# Altium PCB Pcb1.PcbDoc
Units mm, origin at the board's own origin, x right, y up, seen from the top; angles counter-clockwise.
Board outline 35 x 20 mm, 2 copper layers (Top Layer, Bottom Layer), stack 1.569 mm thick; 2 components, 3 nets, 4 pads, 0 vias.
Unrouted connection lines stored in the file: 1.
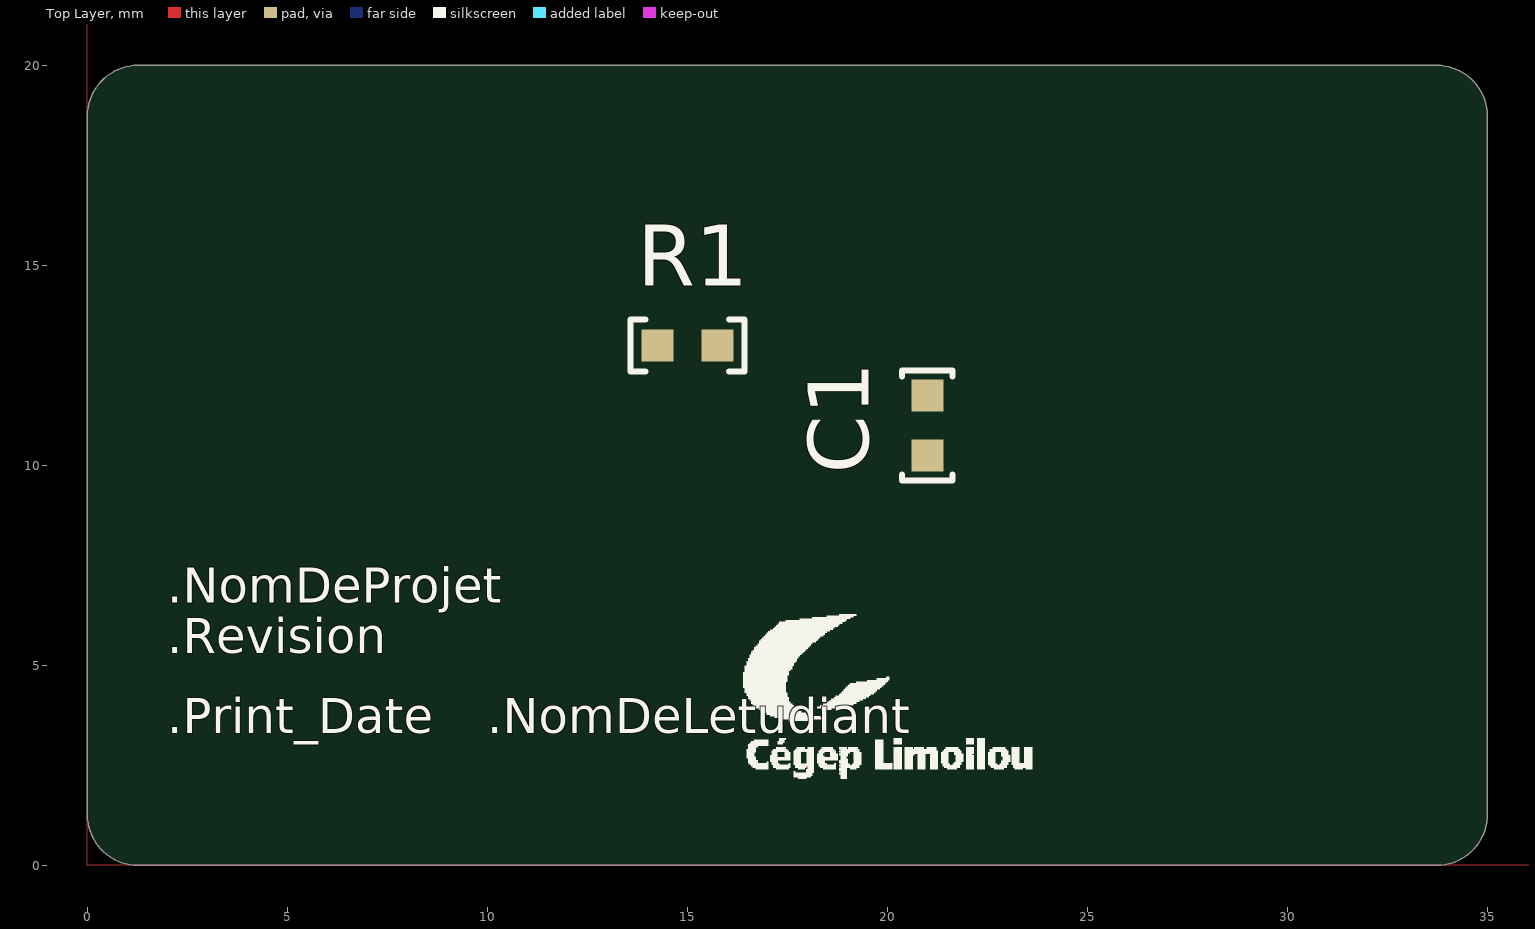
[diagram p0: Top Layer view]
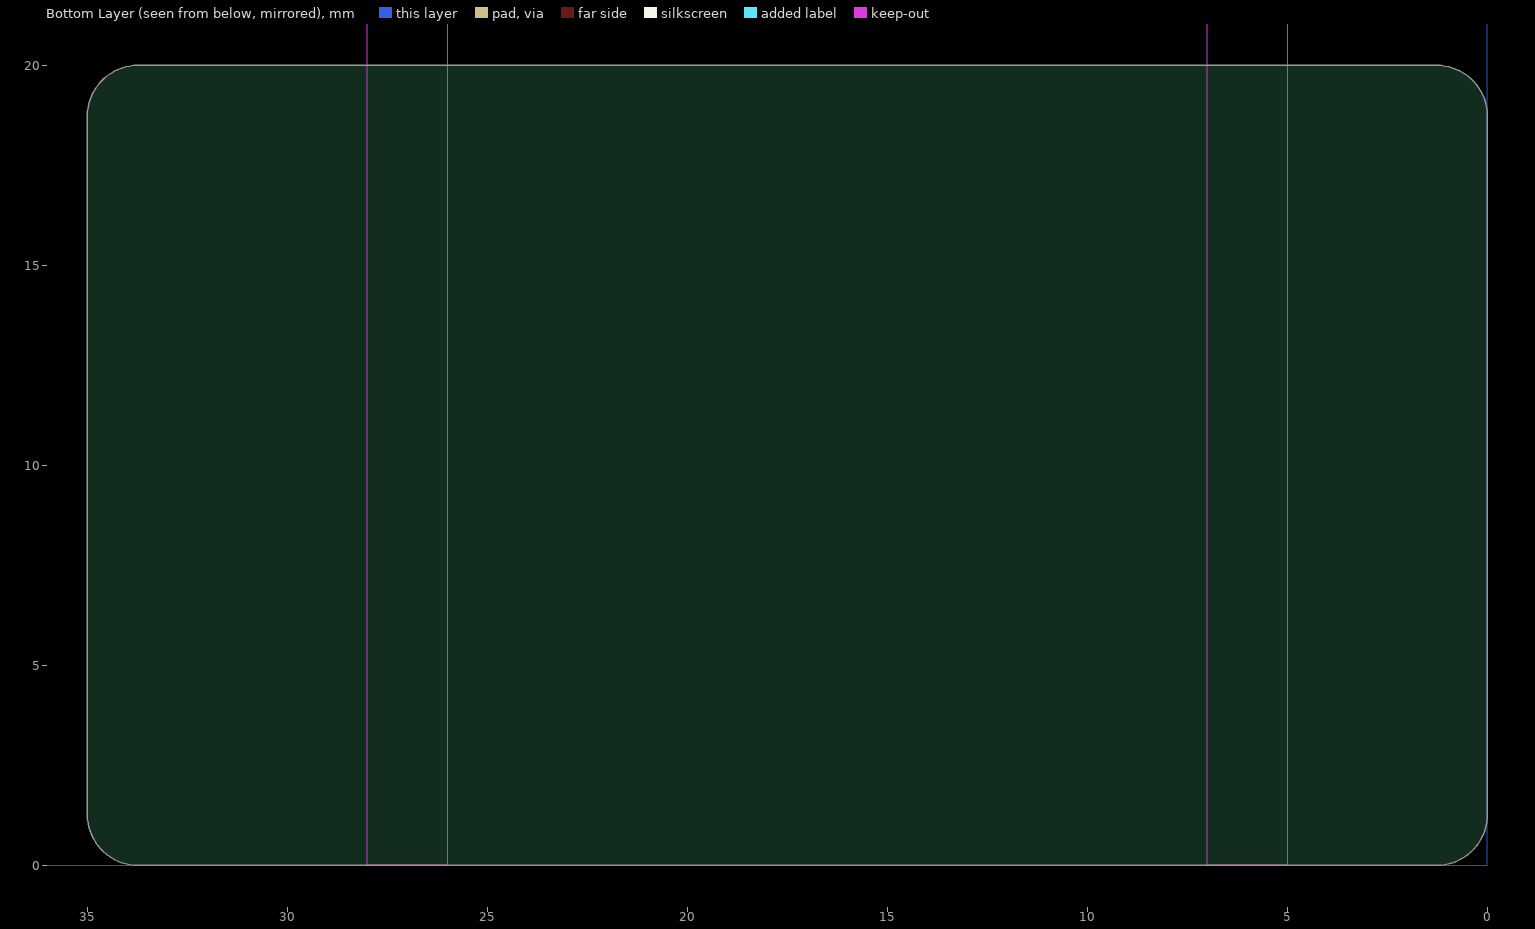
[diagram p1: Bottom Layer view, seen from below]

## Layer stack, top to bottom
Top Solder: solder mask 0.0254, SM-001, Dk 4
Top Layer: signal copper 0.035
Dielectric 1: core 1.4986, Core-043, Dk 4.3
Bottom Layer: signal copper 0.035
Bottom Solder: solder mask 0.0254, SM-001, Dk 4

## Board outline
0,1.27 0,18.73 cw(c1.27,18.73) 1.27,20 33.73,20 cw(c33.73,18.73) 35,18.73 35,1.27 cw(c33.73,1.27) 33.73,0 1.27,0 cw(c1.27,1.27)
cut-out: 81.5,5.5 ccw(c82.5,5.5) 82.5,4.5 87.5,4.5 ccw(c87.493,5.507) 88.5,5.5 88.5,16.502 ccw(c87.5,16.502) 87.5,17.502 82.5,17.498 ccw(c82.5,16.498) 81.5,16.502

## Design rules (kind name [scope] priority, off if disabled: settings)
BoardOutlineClearance [All] p1: gap=0.5 ignorepadtopadclearanceinfootprint=FALSE
Clearance [All] p1: gap=0.5 ignorepadtopadclearanceinfootprint=FALSE
DiffPairsRouting [All] p1: maxlimit=0.125 minlimit=0.125 mostfreqgap=0.125 toplayer_minwidth=0.125 toplayer_maxwidth=0.125 toplayer_prefwidth=0.125 bottomlayer_minwidth=0.125 bottomlayer_maxwidth=0.125 bottomlayer_prefwidth=0.125 maxuncoupledlength=15
HoleSize [All] p1: absolutevalues=TRUE maxlimit=5 minlimit=0.2 maxpercent=80.000 minpercent=20.000
HoleToHoleClearance [All] p1: gap=0.3 allowstackedmicrovias=TRUE
MinimumSolderMaskSliver [All] p1: minsoldermaskwidth=0.075
PlaneClearance [All] p1: clearance=0.5
PlaneConnect [All] p1: pad.planeconnectstyle=Relief pad.reliefexpansion=0.508 pad.reliefentries=4 pad.reliefconductorwidth=0.254 pad.reliefairgap=0.254 via.planeconnectstyle=Direct via.reliefexpansion=0.508 via.reliefentries=4 via.reliefconductorwidth=0.254 via.reliefairgap=0.254
PolygonConnect [All] p1: thpad.connectstyle=Relief thpad.reliefconductorwidth=0.3 thpad.reliefentries=4 thpad.polygonreliefangle="90 Angle" thpad.airgapwidth=0.3 smdpad.connectstyle=Relief smdpad.reliefconductorwidth=0.3 smdpad.reliefentries=4 smdpad.polygonreliefangle="90 Angle" smdpad.airgapwidth=0.3 via.connectstyle=Direct via.reliefconductorwidth=0.254 via.reliefentries=4 via.polygonreliefangle="90 Angle" via.airgapwidth=0.254
RoutingVias [All] p1: holewidth=0.3 width=0.8 viastyle="Through Hole" minholewidth=0.2 minwidth=0.6 maxholewidth=0.7 maxwidth=1.2
SilkToSilkClearance [All] p1: silktosilkclearance=0
SilkToSolderMaskClearance [IsPad] p1: minsilkscreentomaskgap=0 clearancetoexposedcopper=TRUE
SolderMaskExpansion [All] p1: expansion=0.102 istentingtop=FALSE
SupplyNets "Schematic Supply Nets_1" [InNet('VCC_5V')] p1: voltage=0.000
SupplyNets "Schematic Supply Nets" [InNet('GND')] p2: voltage=0.000
Width [All] p1: maxlimit=5 minlimit=0.15 preferedwidth=0.2
22 further rules are at their usual default settings.

## Components (designator, comment, footprint, x,y, rotation, side; value= is the part's Value field where it differs from the comment)
C1 "Cap 100nF 0603" C_1608[0603] 21,11 r90 top value=100nF
R1 "Res 10k 1% 0603" R_1608[0603] 15,13 r0 top value=10k

## Footprints (in the part's own frame and the unit in brackets; to place one, negate y for a bottom-side part, rotate by r counter-clockwise, add the part's x,y. Pads: shape width x height; smd on the part's side, far side on the other; paste and mask are expansions set on the pad)
C_1608[0603] [mm] "Capacitor MLCC; Body 1.6 x 0.8 mm (LxW typ)"
  rect 0.8x0.8 smd: 1(-0.75,0) 2(0.75,0)
  silkscreen extent -1.38,-0.64 1.38,0.64, body extent -0.8,-0.4 0.8,0.4, height 0.8
R_1608[0603] [mm] "Chip Resistor; Body 1.6 x 0.8 mm (LxW typ)"
  rect 0.8x0.8 smd: 1(-0.75,0) 2(0.75,0)
  silkscreen extent -1.43,-0.65 1.43,0.65, body extent -0.77,-0.42 0.78,0.43, height 0.45

## Part data
C1: library part CAP002, "Capacitor type 1", Dielectric=X7R, Manufacturer 1=Yageo, Manufacturer Part Number 1=CC0603KRX7R9BB104, Rated Voltage=50V, Supplier Part Number 1=C14663, Tolerance=10%, CEGEP=COND0143SM, LibRef=CAP002, Mount=SMT, Supplier 1=LCSC
R1: library part RES001, "Resistor type 1", Manufacturer 1=Yageo, Manufacturer Part Number 1=RC0603FR-0710KL, Max Working Voltage=75V, Supplier Part Number 1=C98220, Tolerance=1%, CEGEP=RESI0238-0603, LibRef=RES001, Mount=SMT, Puissance=1/10W, Supplier 1=LCSC

## Nets (pads, with @x,y where several pads share a name; then routed paths per layer and width w, separated by ;. In a path a pad name is that pad's centre, name@x,y a point inside that pad or via, vN(x,y) a via of type N, cw(c..) or ccw(c..) an arc to the next point about the centre after c; other vN are vias at no path point)
GND: C1.1
NetC1_2: C1.2 R1.2
VCC_5V: R1.1

## Polygon pours and split planes (outlines as drawn)
GND on Bottom Layer "topGND" (solid, remove dead copper, shelved, pour order 1): 0,0 0,34 14,48 51,48 54,51 54,51.001 76,51.001 76,51 79,48 116,48 130,34 130,0
GND on Top Layer "topGND" (solid, remove dead copper, shelved, pour order 0): 0,0 0,34 14,48 51,48 54,51 54,51.001 76,51.001 76,51 79,48 116,48 130,34 130,0

## Keep-outs
Bottom Layer:
  region: 5,0 7,0 7,41 5,39
  region: 125,0 123,0 123,41 125,39
  region: 102,0 104,0 104,48 102,48
  region: 79,0 81,0 81,48 79,48
  region: 49,0 51,0 51,48 49,48
  region: 26,0 28,0 28,48 26,48

## Silkscreen, mask and mechanical layers (free items; w line width, h text height)
Top Overlay:
  drawing of 18 lines, arcs and shapes, not listed
  text ".NomDeProjet" at 2,6.282 h1.5
  text ".Revision" at 2,5.017 h1.5
  text ".Print_Date" at 1.999,3.017 h1.5
  text ".NomDeLetudiant" at 10,3.015 h1.5
Board:
  the board outline again, w0.5
Drill Drawing:
  lines w0.25: 62.716,38 68.991,38 85,38 93.958,38 101.08,38 ; 62.716,41 68.991,41 85,41 93.958,41 101.08,41 ; 62.716,44 68.991,44 85,44 93.958,44 101.08,44 ; 62.716,47 68.991,47 85,47 93.958,47 101.08,47 ; 62.716,50 68.991,50 85,50 93.958,50 101.08,50 ; 62.716,53 68.991,53 85,53 93.958,53 101.08,53 ; 62.716,56 68.991,56 85,56 93.958,56 101.08,56 ; 62.716,59 68.991,59 85,59 93.958,59 101.08,59 ; 62.716,62 101.08,62 ; 68.991,65 68.991,35 ; 69.766,-4.431 69.766,1.775 ; 75.833,-4.431 75.833,1.775 ; 84.397,-4.431 84.397,1.775 ; 85,65 85,35 ; 90.586,-4.431 90.586,1.775 ; 93.958,65 93.958,35 ; 99.597,-4.431 99.597,1.775 ; 111.925,-4.431 111.925,1.775 ; 119.308,-4.431 119.308,1.775 ; 128.955,-4.431 128.955,1.775 ; 68.991,35 85,35 ; 68.991,35 62.716,35 62.716,65 101.08,65 101.08,35 93.958,35 ; 85,35 93.958,35 ; 61.784,-4.431 140.199,-4.431 140.199,1.775 61.784,1.775 61.784,-4.431 ; 61.784,-1.328 140.199,-1.328 61.784,-1.328
  text "Layer" at 64.216,62.75 h1.5
  text "Name" at 70.491,62.75 h1.5
  text "Thickness" at 86.5,62.75 h1.5
  text "Gerber" at 95.458,62.75 h1.5
  text "Top Overlay" at 70.491,59.75 h1.5
  text "GTO" at 95.458,59.75 h1.5
  text "Top Solder" at 70.491,56.75 h1.5
  text "0.025mm" at 86.5,56.75 h1.5
  text "GTS" at 95.458,56.75 h1.5
  text "Top Surface Finish" at 70.491,53.75 h1.5
  text "0.020mm" at 86.5,53.75 h1.5
  text "1" at 64.216,50.75 h1.5
  text "Top Layer" at 70.491,50.75 h1.5
  text "0.035mm" at 86.5,50.75 h1.5
  text "GTL" at 95.458,50.75 h1.5
  text "Dielectric 1" at 70.491,47.75 h1.5
  text "1.499mm" at 86.5,47.75 h1.5
  text "2" at 64.214,44.75 h1.5
  text "Bottom Layer" at 70.491,44.75 h1.5
  text "0.035mm" at 86.5,44.75 h1.5
  text "GBL" at 95.458,44.75 h1.5
  text "Bottom Surface Finish" at 70.491,41.75 h1.5
  text "0.020mm" at 86.5,41.75 h1.5
  text "Bottom Solder" at 70.491,38.75 h1.5
  text "0.025mm" at 86.5,38.75 h1.5
  text "GBS" at 95.458,38.75 h1.5
  text "Bottom Overlay" at 70.491,35.75 h1.5
  text "GBO" at 95.458,35.75 h1.5
  text "Total board thickness:" at 64.216,32.75 h1.5
  text "1.659mm" at 86.5,32.75 h1.5
  text "Symbol" at 63.646,-0.397 h1.8
  text "Count" at 70.697,-0.397 h1.8
  text "Hole Size" at 76.764,-0.397 h1.8
  text "Plated" at 85.327,-0.397 h1.8
  text "Hole Type" at 91.516,-0.397 h1.8
  text "Drill Layer Pair" at 100.528,-0.397 h1.8
  text "Via/Pad" at 112.856,-0.397 h1.8
  text "Pad Shape" at 120.239,-0.397 h1.8
  text "Hole Length" at 129.886,-0.397 h1.8

## Dimensions
0,18.73 to 35,18.73 on Drill Drawing
1.27,0 to 1.27,20 on Drill Drawing